# Altium PCB vias.PcbDoc
Units mm, origin at the board's own origin, x right, y up, seen from the top; angles counter-clockwise.
Board outline 152.4 x 101.6 mm, 2 copper layers (Top Layer, Bottom Layer); 5 components, 6 nets, 15 pads, 15 vias.
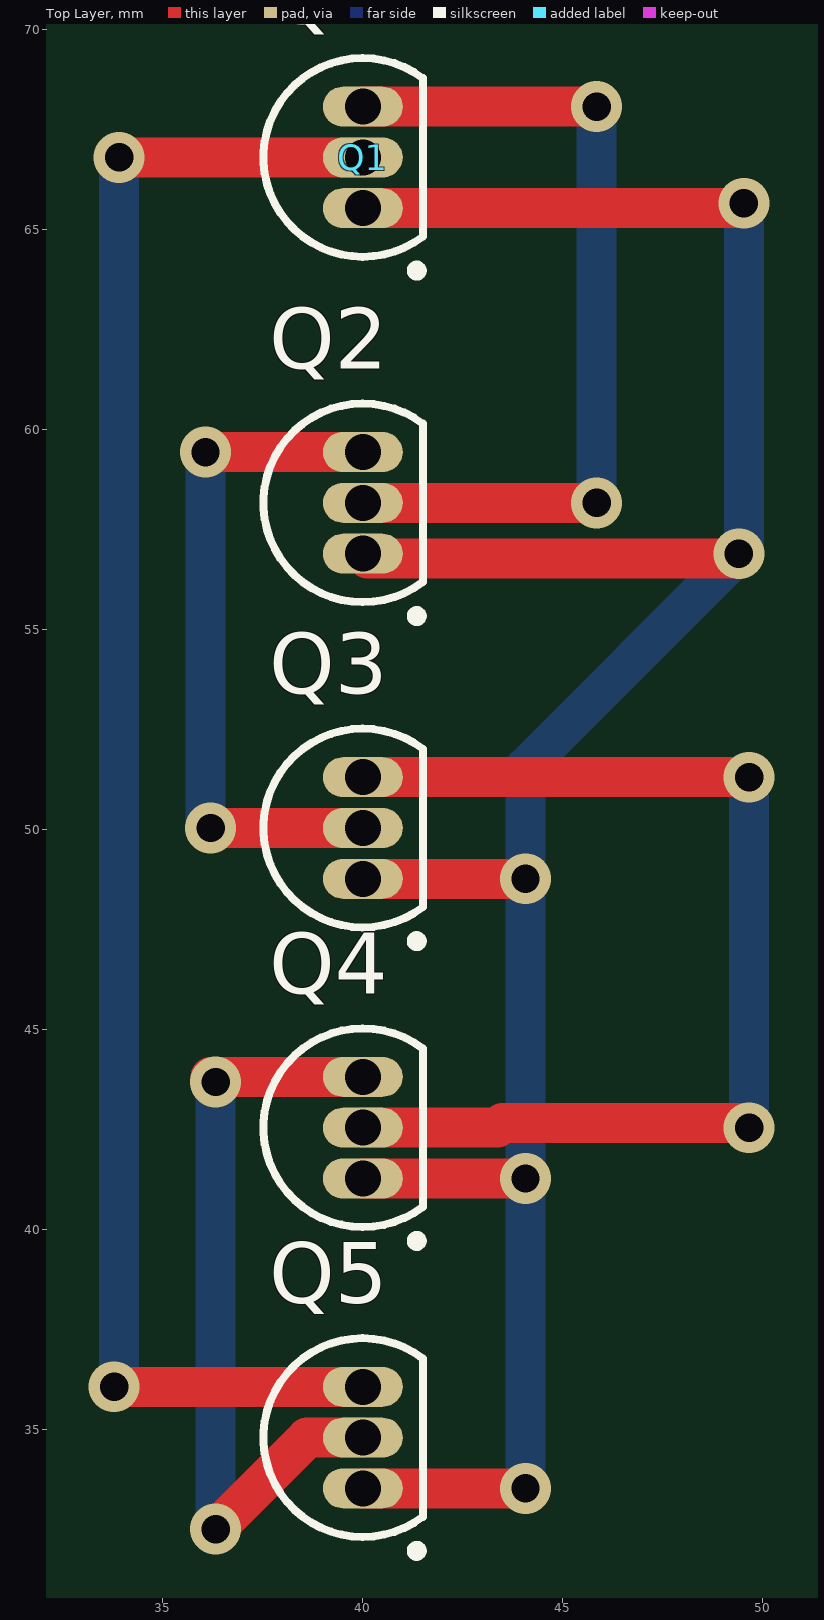
[diagram p0: Top Layer view]
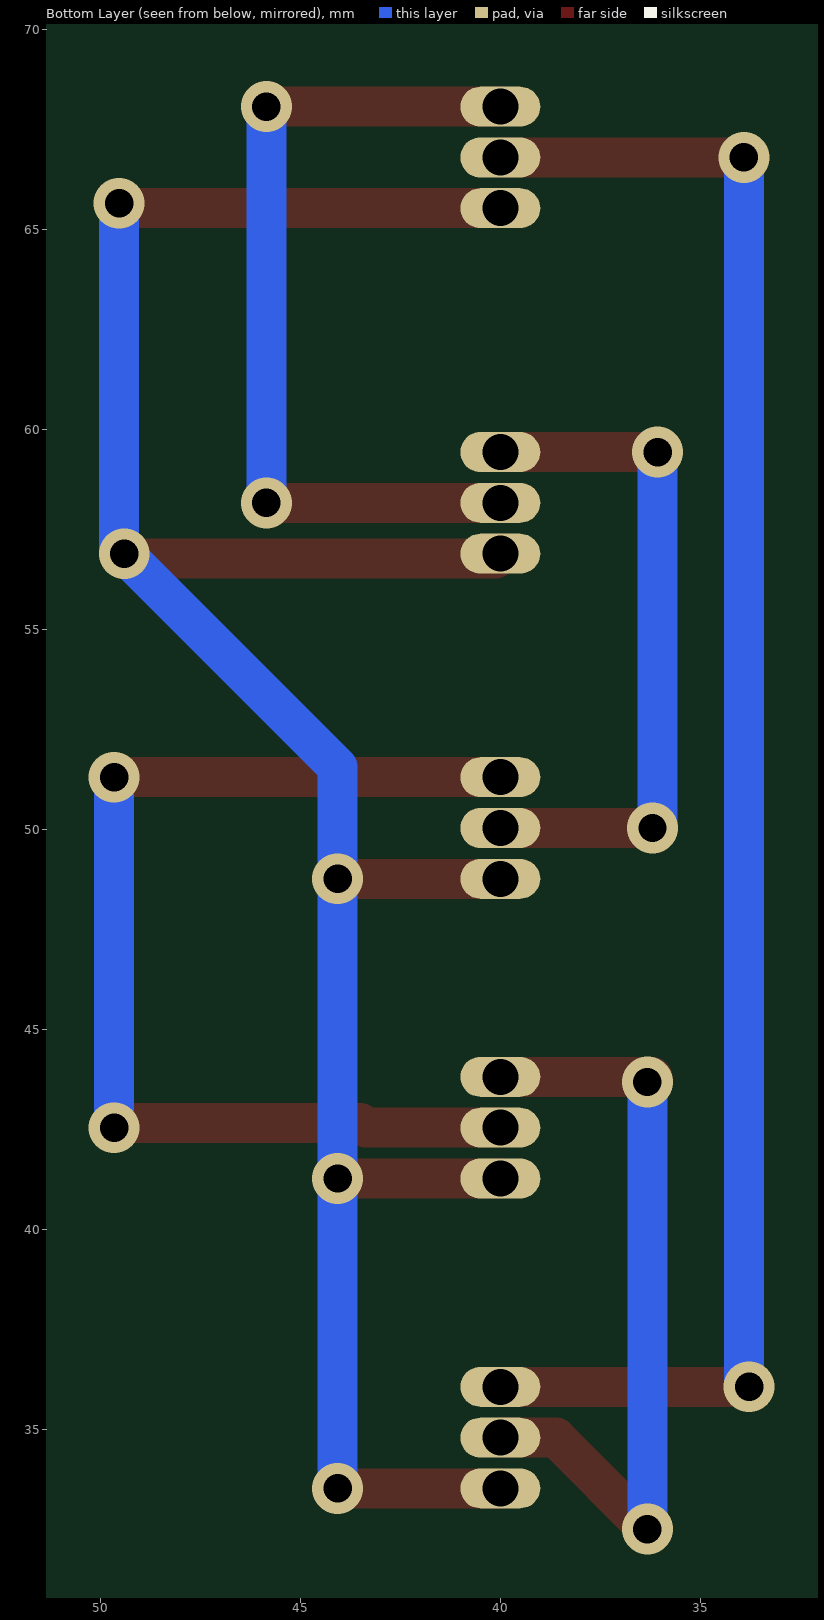
[diagram p1: Bottom Layer view, seen from below]

## Layer stack, top to bottom
Top Solder: solder mask 0.0102, Solder Resist, Dk 3.5
Top Layer: signal copper 0.0356
Dielectric 1: dielectric 0.32, FR-4, Dk 4.8
Bottom Layer: signal copper 0.0356
Bottom Solder: solder mask 0.0102, Solder Resist, Dk 3.5

## Board outline
25.4,25.4 177.8,25.4 177.8,127 25.4,127

## Design rules (kind name [scope] priority, off if disabled: settings)
Clearance [All] p1: gap=0.254 ignorepadtopadclearanceinfootprint=FALSE except(0: Arc-Hole Track-Hole SMDPad-Hole THPad-Hole Via-Hole Fill-Hole Poly-Hole Region-Hole Text-Hole)
PolygonConnect [All] p1: connectstyle=Relief reliefconductorwidth=0.254 reliefentries=4 polygonreliefangle="90 Angle" airgapwidth=0.254
RoomDefinition vias [InComponentClass('vias')] p1 off: confinementstyle=ConfineIn formatcopy=TRUE lockcomponents=FALSE outline 178.943,26.924 205.359,26.924 205.359,35.56 178.943,35.56
RoutingVias [All] p1: holewidth=0.711 width=1.27 viastyle="Through Hole" minholewidth=0.711 minwidth=1.27 maxholewidth=0.711 maxwidth=1.27
SolderMaskExpansion [All] p1: expansion=0.102
Width [All] p1: maxlimit=1 minlimit=0.254 preferedwidth=0.254
30 further rules are at their usual default settings.

## Components (designator, comment, footprint, x,y, rotation, side; value= is the part's Value field where it differs from the comment)
Q1 "2N3904" TO-92A 40,66.802 r0 top
Q2 "2N3904" TO-92A 40,58.166 r0 top
Q3 "2N3904" TO-92A 40,50.038 r0 top
Q4 "2N3904" TO-92A 40,42.545 r0 top
Q5 "2N3904" TO-92A 40,34.798 r0 top

## Footprints (in the part's own frame and the unit in brackets; to place one, negate y for a bottom-side part, rotate by r counter-clockwise, add the part's x,y. Pads: shape width x height; smd on the part's side, far side on the other; paste and mask are expansions set on the pad)
TO-92A [mm] "TO, Flat Index; 3 In-Line, Axial Leads; Body Dia. 4.5mm; Leads 0.51 x 0.48 mm (max)"
  oval 2x1 hole 0.9: 1(0,-1.27) 2(0,0) 3(0,1.27)
  silkscreen extent -2.48,-2.95 1.5,2.48, body extent -2.48,-2.5 1.5,2.5, height 6.86

## Part data
Q1 Q2 Q3 Q4 Q5: "NPN General Purpose Amplifier", ComponentLink1Description="Manufacturer Link", ComponentLink1URL=http://www.fairchildsemi.com/, ComponentLink2Description=Datasheet, ComponentLink2URL=http://www.fairchildsemi.com/ds/2N%2F2N3904.pdf, DatasheetVersion=1997, LatestRevisionDate=15-Jan-2003, LatestRevisionNote="PCB Footprint 'BCY-W3/D4.7' replaced", PackageDescription="TO, Flat Index; 3 In-Line, Axial Leads; Body Dia. 4.5mm; Leads 0.51 x 0.48 mm (max)", PackageReference=TO-92A, PackageVersion=Sep-1998, Published=8-Jun-2000, Publisher="Altium Limited"

## Via types
v1: diameter 1.27, hole 0.711, Top Layer to Bottom Layer, 15 vias

## Nets (pads, with @x,y where several pads share a name; then routed paths per layer and width w, separated by ;. In a path a pad name is that pad's centre, name@x,y a point inside that pad or via, vN(x,y) a via of type N, cw(c..) or ccw(c..) an arc to the next point about the centre after c; other vN are vias at no path point)
NetQ1_1: Q1.1 Q2.1 Q3.1 Q4.1 Q5.1 | length 65.7
  Top Layer w1: Q5.1 v1(44.069,33.528) ; Q4.1 v1(44.069,41.275) ; Q3.1 v1(44.069,48.768) ; Q2.1 40.119,56.777 49.284,56.777 v1(49.403,56.896) ; Q1.1 49.403,65.532 v1(49.53,65.659)
  Bottom Layer w1: v1(44.069,33.528) v1(44.069,41.275) v1(44.069,48.768) 44.069,51.562 v1(49.403,56.896) 49.53,57.023 v1(49.53,65.659)
NetQ1_2: Q1.2 Q5.3 | length 43.1
  Top Layer w1: v1(33.782,36.068) Q5.3 ; v1(33.909,66.802) Q1.2
  Bottom Layer w1: v1(33.782,36.068) 33.909,36.195 v1(33.909,66.802)
NetQ1_3: Q1.3 Q2.2 | length 21.6
  Top Layer w1: Q2.2 v1(45.847,58.166) ; Q1.3 v1(45.847,68.072)
  Bottom Layer w1: v1(45.847,58.166) v1(45.847,68.072)
NetQ2_3: Q2.3 Q3.2 | length 17.2
  Top Layer w1: v1(36.068,59.436) Q2.3 ; v1(36.195,50.038) Q3.2
  Bottom Layer w1: v1(36.068,59.436) 36.068,50.165 v1(36.195,50.038)
NetQ3_3: Q3.3 Q4.2 | length 28.2
  Top Layer w1: Q4.2 43.375,42.545 43.494,42.664 49.538,42.664 v1(49.657,42.545) ; Q3.3 v1(49.657,51.308)
  Bottom Layer w1: v1(49.657,42.545) v1(49.657,51.308)
NetQ4_3: Q4.3 Q5.2 | length 19.8
  Top Layer w1: v1(36.322,32.512) 38.608,34.798 Q5.2 ; v1(36.322,43.688) 36.195,43.815 Q4.3
  Bottom Layer w1: v1(36.322,32.512) v1(36.322,43.688)